# EAGLE board untitled (EAGLE 9.6.1)
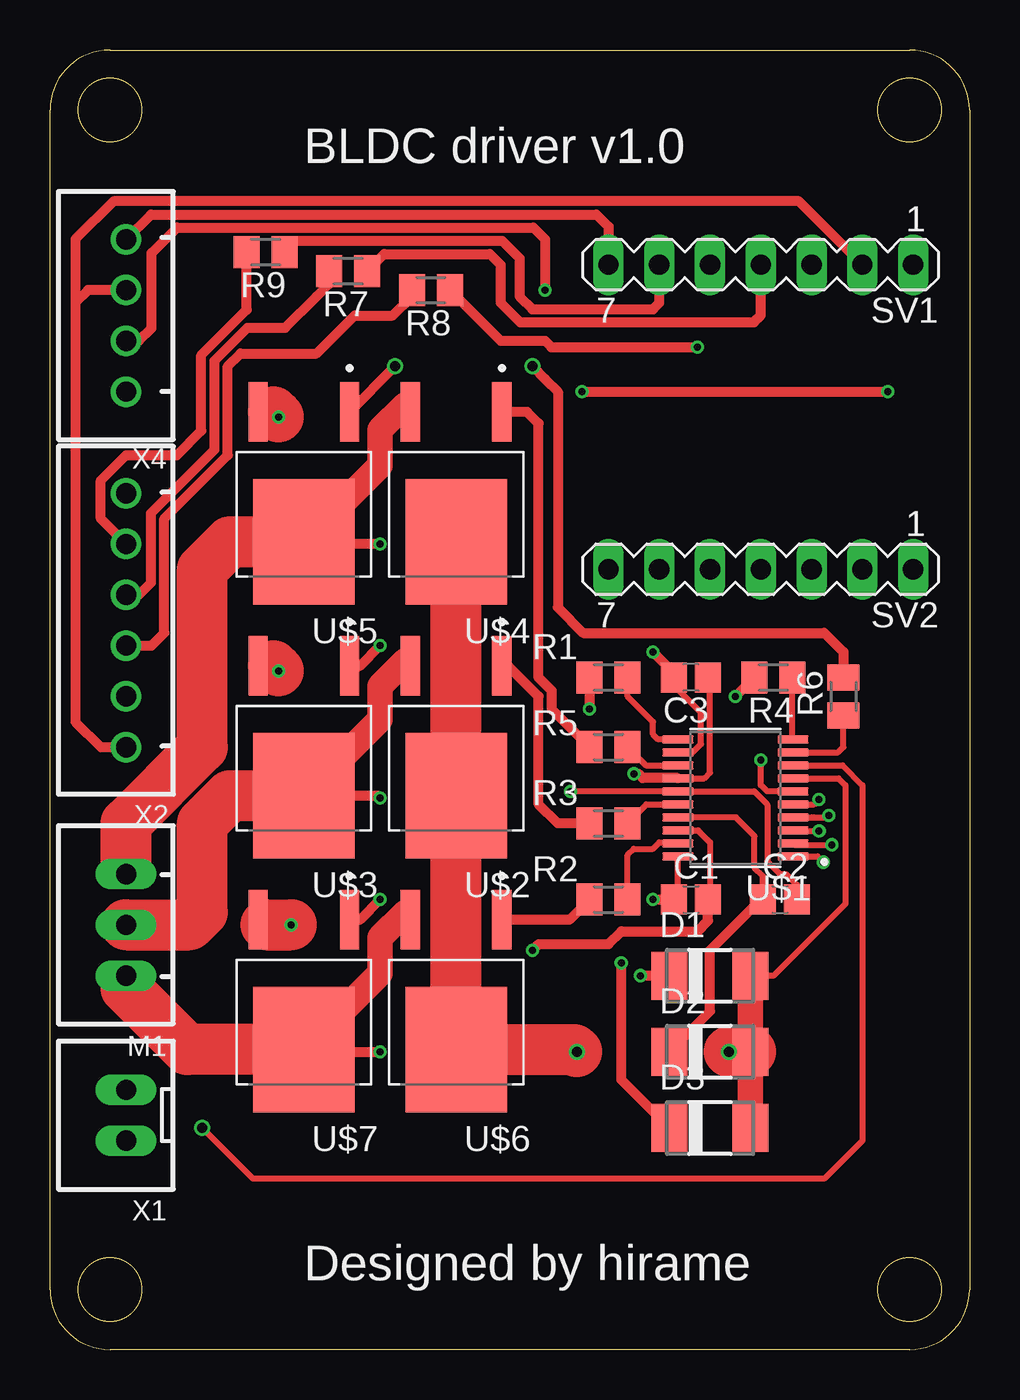
[diagram p0: board, top side]
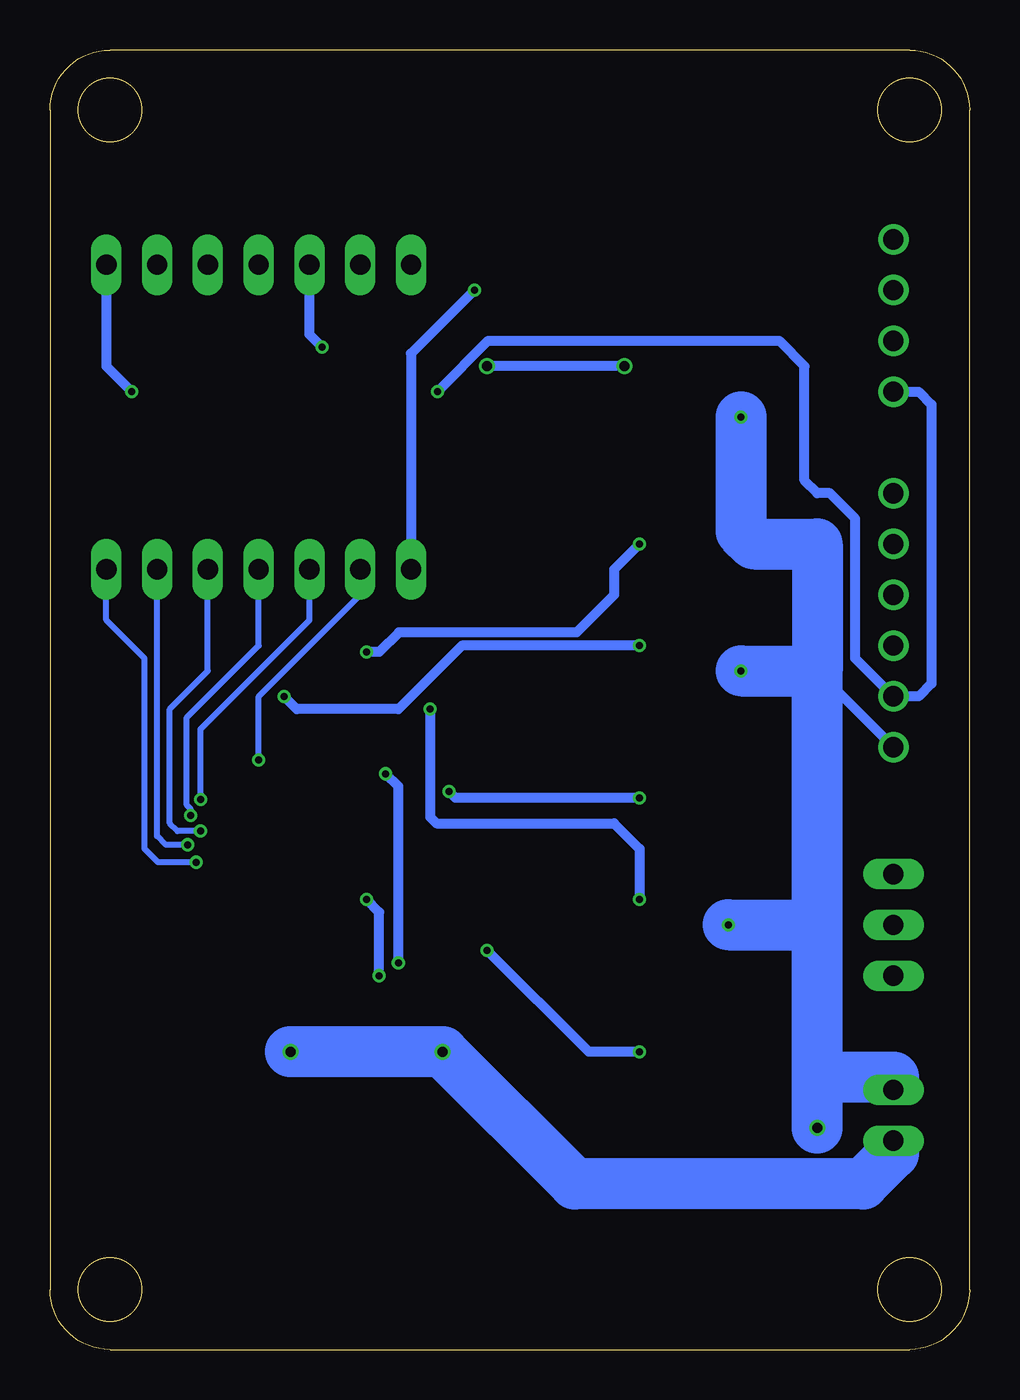
[diagram p1: board, bottom side, seen from below]

Size 46 x 65 mm. Coordinates in mm from the lower left corner, seen from the top.
Outline: 0,3 0,62 arc-90 3,65 43,65 arc-90 46,62 46,3 arc-90 43,0 3,0 arc-90 0,3
Outline: circle at 3,3 radius 1.6
Outline: circle at 3,62 radius 1.6
Outline: circle at 43,62 radius 1.6
Outline: circle at 43,3 radius 1.6
Copper layers (1*16): Top 0.035mm / dielectric 1.6mm / Bottom 0.035mm
Design rules "Elecrow_2-layer_PCB_eagle_rule": minimum track width 6mil, minimum drill 12mil, track to track 6mil, track to pad 6mil, pad to pad 6mil, via to via 8mil, smd to smd 0mil, copper to edge 20mil, drill to drill 10mil, minimum pad ring 6mil, minimum via ring 6mil, stop-mask expansion 0mil, vias tented up to drill 100mil, thermal gap 10mil

## Footprints (pad centres in the part's own frame; a part is rotated, then mirrored left to right if it is on the bottom)
C2012 = smd 1.3 x 1.5: 1 -0.85,0; 2 0.85,0
DO-214AC = smd 1.8 x 2.4: A 2.025,0; C -2.025,0
JST-XH-03-PACKAGE-LONG-PAD = drill 1.016 long: 1 -2.54,0; 2 0,0; 3 2.54,0
M2012 = smd 1.3 x 1.6: 1 -0.95,0; 2 0.95,0
MA07-1 = drill 1.016 long: 1 -7.62,0; 2 -5.08,0; 3 -2.54,0; 4 0,0; 5 2.54,0; 6 5.08,0; 7 7.62,0
SOIC65P640X120-20N = smd 1.56 x 0.41: 1 -2.88,2.925; 2 -2.88,2.275; 3 -2.88,1.625; 4 -2.88,0.975; 5 -2.88,0.325; 6 -2.88,-0.325; 7 -2.88,-0.975; 8 -2.88,-1.625; 9 -2.88,-2.275; 10 -2.88,-2.925; 11 2.88,-2.925; 12 2.88,-2.275; 13 2.88,-1.625; 14 2.88,-0.975; 15 2.88,-0.325; 16 2.88,0.325; 17 2.88,0.975; 18 2.88,1.625; 19 2.88,2.275; 20 2.88,2.925
DPAK228P990X238-4N = smd 0.97 x 2.98: 1 -2.286,-4.07; 3 2.286,-4.07 | smd 5.07 x 6.27: 4 0,2.42
JST-XH-02-PACKAGE-LONG-PAD = drill 1.016 long: 1 -1.27,0; 2 1.27,0
JST-XH-06-PACKAGE-ROUND-PAD = drill 1.016: 1 -6.35,0; 2 -3.81,0; 3 -1.27,0; 4 1.27,0; 5 3.81,0; 6 6.35,0
JST-XH-04-PACKAGE-ROUND-PAD = drill 1.016: 1 -3.81,0; 2 -1.27,0; 3 1.27,0; 4 3.81,0

## Placement (x,y rotation side)
C1  1uF  [C2012]  32.07,22.51 0 top
C2  1uF  [C2012]  36.51,22.51 0 top
C3  1uF  [C2012]  32.07,33.62 180 top
D1  [DO-214AC]  33.02,18.7 0 top
D2  [DO-214AC]  33.02,14.89 0 top
D3  [DO-214AC]  33.02,11.08 0 top
M1  JST-XH-03-PIN-LONG-PAD  [JST-XH-03-PACKAGE-LONG-PAD]  3.81,21.24 90 top
R1  [M2012]  27.94,33.62 180 top
R2  [M2012]  27.94,22.51 180 top
R3  [M2012]  27.94,26.32 180 top
R4  [M2012]  36.2,33.62 180 top
R5  [M2012]  27.94,30.13 180 top
R6  [M2012]  39.69,32.67 90 top
R7  300Ω  [M2012]  14.92,53.94 180 top
R8  300Ω  [M2012]  19.05,52.99 180 top
R9  300Ω  [M2012]  10.79,54.9 180 top
SV1  [MA07-1]  35.56,54.26 180 top
SV2  [MA07-1]  35.56,39.02 180 top
U$1  DRV8300NIPWR  [SOIC65P640X120-20N]  34.29,27.59 180 top
U$2  H-CHMOSFET  [DPAK228P990X238-4N]  20.32,30.13 180 top
U$3  H-CHMOSFET  [DPAK228P990X238-4N]  12.7,30.13 180 top
U$4  H-CHMOSFET  [DPAK228P990X238-4N]  20.32,42.83 180 top
U$5  H-CHMOSFET  [DPAK228P990X238-4N]  12.7,42.83 180 top
U$6  H-CHMOSFET  [DPAK228P990X238-4N]  20.32,17.43 180 top
U$7  H-CHMOSFET  [DPAK228P990X238-4N]  12.7,17.43 180 top
X1  JST-XH-02-PIN-LONG-PAD  [JST-XH-02-PACKAGE-LONG-PAD]  3.81,11.71 90 top
X2  JST-XH-06-PIN-ROUND-PAD  [JST-XH-06-PACKAGE-ROUND-PAD]  3.81,36.48 90 top
X4  JST-XH-04-PIN-ROUND-PAD  [JST-XH-04-PACKAGE-ROUND-PAD]  3.81,51.72 90 top

## Library data of the parts
C1-C3 R1-R9 = adafruit
D1-D3 = diode
M1 X1 X2 X4 = Rembrandt Electronics - JST XH Connectors v1-0
SV1 SV2 = con-lstb; OC_FARNELL: unknown; OC_NEWARK: unknown
U$1 = drv8300
U$2-U$7 = N-ch mosfet

## Nets
+5V: SV1.1 X2.2 X4.1
CS: X2.6
GND: SV1.2 U$1.8 U$3.3 U$5.3 U$7.3 X1.2 X2.1 X4.3
HA: SV2.1 U$1.1
HB: SV2.2 U$1.2
HC: SV2.3 U$1.3
LA: SV2.4 U$1.4
LB: SV2.5 U$1.5
LC: SV2.6 U$1.6
MISO: R8.2 X2.3
MOSI: R7.2 X2.4
N$1: C2.2 M1.2 U$1.15 U$2.3 U$3.4
N$2: C3.2 M1.3 U$1.12 U$4.3 U$5.4
N$3: C1.2 M1.1 U$1.18 U$6.3 U$7.4
N$4: R2.2 U$6.1
N$5: R1.2 U$7.1
N$6: R2.1 U$1.19
N$7: R1.1 U$1.11
N$8: R3.2 U$2.1
N$9: C1.1 D1.C U$1.20
N$10: R4.2 U$3.1
N$11: R7.1 SV1.4
N$12: R3.1 U$1.16
N$13: C2.1 D2.C U$1.17
N$14: R4.1 U$1.10
N$15: R6.2 U$5.1
N$16: R5.2 U$4.1
N$17: R5.1 U$1.13
N$18: R6.1 U$1.9
N$19: C3.1 D3.C U$1.14
N$20: R9.1 SV1.6
N$21: R8.1 SV1.5
RX: SV1.7 X4.4
SCK: R9.2 X2.5
TX: SV2.7 X4.2
VCC: D1.A D2.A D3.A U$1.7 U$2.4 U$4.4 U$6.4 X1.1

## Tracks (layer width: path | path; a pad name or v marks a point on that pad's centre or on a via)
+5V  (via drill 0.35)
  Top 0.508: v26.62,47.91 38.1,47.91 v41.91,47.91
  Bottom 0.508: X4.1 2.54,47.91 1.91,47.27 1.91,33.3 2.54,32.67 X2.2 5.71,34.58 5.71,41.56 6.99,42.83 7.62,42.83 8.26,43.47 8.26,49.18 9.53,50.45 24.08,50.45 v26.62,47.91 | SV1.1 43.18,49.18 v41.91,47.91
GND  (via drill 0.35, 0.5)
  Top 0.305: U$1.8 39.65,29.21 40.64,28.23 40.64,10.45 38.73,8.54 10.16,8.54 v7.62,11.08 | 11.17,46.9 U$5.3
  Top 0.508: 11.17,34.2 U$3.3 | 10.79,21.24 10.54,21.5 U$7.3 | X4.3 1.91,52.99 1.27,52.35 | X2.1 2.54,30.13 1.27,31.4 1.27,52.35 | SV1.2 37.47,57.44 3.17,57.44 1.27,55.53 1.27,52.35
  Top 2.54: v11.43,33.94 11.17,34.2 | v11.43,46.64 11.17,46.9 | 10.79,21.24 v12.06,21.24
  Bottom 0.305: X1.2 3.81,13.62
  Bottom 0.508: X2.1 7.62,33.94
  Bottom 2.54: v7.62,11.08 7.62,13.62 | 7.62,13.62 7.62,21.24 | 7.62,21.24 7.62,33.94 | v11.43,33.94 7.62,33.94 | v11.43,46.64 11.43,40.92 10.79,40.29 7.62,40.29 7.62,33.94 | 3.81,13.62 7.62,13.62 | v12.06,21.24 7.62,21.24
HA  (via drill 0.35)
  Top 0.305: U$1.1 38.41,24.66 v38.7,24.38
  Bottom 0.305: v38.7,24.38 40.6,24.38 41.27,25.05 41.27,34.58 43.18,36.48 SV2.1
HB  (via drill 0.35)
  Top 0.305: U$1.2 37.24,25.25 v39.11,25.25
  Bottom 0.305: v39.11,25.25 40.2,25.25 40.64,25.68 SV2.2
HC  (via drill 0.35)
  Top 0.305: U$1.3 37.2,25.93 v38.47,25.93
  Bottom 0.305: v38.47,25.93 39.62,25.93 40.01,26.32 40.01,32.03 38.1,33.94 SV2.3
LA  (via drill 0.35)
  Top 0.305: U$1.4 38.1,26.61 38.23,26.61 38.86,26.61 v38.97,26.72
  Bottom 0.305: v38.97,26.72 38.97,27.04 39.15,27.23 39.15,31.62 35.56,35.21 SV2.4
LB  (via drill 0.35)
  Top 0.305: U$1.5 38.23,27.27 v38.47,27.51
  Bottom 0.305: v38.47,27.51 38.47,31.03 33.02,36.48 SV2.5
LC  (via drill 0.35)
  Top 0.305: U$1.6 35.88,27.91 35.56,28.24 v35.56,29.5
  Bottom 0.305: v35.56,29.5 35.56,32.67 30.48,37.75 SV2.6
MISO
  Top 0.508: X2.3 5.08,35.21 5.71,35.84 5.71,41.56 8.89,44.73 8.89,49.18 9.53,49.81 13.34,49.81 15.24,51.72 17.14,51.72 18.1,52.67 R8.2
MOSI
  Top 0.508: X2.4 4.45,37.75 5.05,38.36 5.05,41.83 8.23,45.01 8.23,49.45 9.89,51.11 10.82,51.11 11.77,51.11 13.34,52.67 13.97,53.31 R7.2
N$1  (via drill 0.35)
  Top 0.305: C2.2 37.36,23.25 36.83,23.78 36.51,23.78 35.88,24.41 35.88,27.27 35.23,27.91 U$1.15 v26.04,27.91
  Top 0.508: U$2.3 17.78,34.45 | U$3.4 16.39,27.71 v16.51,27.59
  Top 1.27: U$3.4 16.51,31.52 16.51,33.18 17.78,34.45
  Top 2.54: U$3.4 9.01,27.71 7.62,26.32 7.62,21.88 6.99,21.24 M1.2
  Bottom 0.508: v26.04,27.91 25.72,27.59 v16.51,27.59
N$2  (via drill 0.35)
  Top 0.2: U$4.3 17.78,47.15 17.78,47.27
  Top 0.305: U$1.12 32.15,29.86 32.56,30.28 32.56,31.86 31.22,33.2 C3.2
  Top 0.508: v30.16,34.89 31.22,33.84 C3.2 | M1.3 3.81,24.41 | v16.51,40.29 12.82,40.29 U$5.4
  Top 1.27: U$5.4 16.51,44.22 16.51,46.01 17.78,47.27
  Top 2.54: 3.81,24.41 3.81,26.32 7.62,30.13 7.62,39.02 9.01,40.41 U$5.4
  Bottom 0.508: v16.51,40.29 17.78,39.02 17.78,37.75 19.66,35.87 28.55,35.87 29.53,34.89 v30.16,34.89
N$3  (via drill 0.35)
  Top 0.152: U$7.4 12.82,14.89
  Top 0.2: U$6.3 17.78,21.75 17.78,21.88
  Top 0.305: U$1.18 32.42,25.96 33.02,25.37 33.02,22.61 C1.2
  Top 0.508: 12.82,14.89 v16.51,14.89 | v24.13,19.97 24.45,20.29 27.94,20.29 28.57,20.92 32.38,20.92 32.92,21.45 C1.2 | 3.81,18.06 M1.1
  Top 1.27: U$7.4 16.51,18.82 16.51,20.61 17.78,21.88
  Top 2.54: U$7.4 6.87,15.01 3.81,18.06
  Bottom 0.508: v16.51,14.89 19.05,14.89 v24.13,19.97
N$4
  Top 0.508: R2.2 25.98,21.5 U$6.1
N$5  (via drill 0.35)
  Top 0.508: R1.2 v26.99,32.04 v26.99,32.03 | v16.51,22.51 15.5,21.5 U$7.1
  Bottom 0.508: v26.99,32.03 26.99,26.64 26.67,26.32 17.78,26.32 16.51,25.05 v16.51,22.51
N$6
  Top 0.305: R2.1 28.89,24.73 29.21,25.05 30.16,25.05 30.48,25.37 31.36,25.37 U$1.19
N$7
  Top 0.305: U$1.11 30.41,30.52 30.16,30.77 30.16,31.4 28.89,32.67 R1.1
N$8
  Top 0.508: R3.2 25.4,26.32 24.45,27.27 24.45,32.67 22.92,34.2 U$2.1
N$9  (via drill 0.35)
  Top 0.305: 31.41,22.7 U$1.20
  Top 0.508: D1.C v29.53,18.7 | v30.16,22.51 C1.1 31.41,22.7
  Bottom 0.508: v30.16,22.51 29.53,21.88 v29.53,18.7
N$10  (via drill 0.35)
  Top 0.508: U$3.1 15.5,34.2 v16.51,35.21 | v34.29,32.67 R4.2
  Bottom 0.508: v16.51,35.21 25.4,35.21 28.57,32.03 33.66,32.03 v34.29,32.67
N$11
  Top 0.508: R7.1 16.72,54.79 22.01,54.79 22.54,54.26 22.54,52.35 23.52,51.38 35.22,51.38 35.56,51.72 SV1.4
N$12
  Top 0.305: R3.1 29.84,27.27 U$1.16
N$13
  Top 0.305: C2.1 35.66,23.68 35.24,24.1 35.24,25.68 34.31,26.61 U$1.17
  Top 0.508: D2.C 33.02,16.91 33.02,19.97 35.56,22.51 C2.1
N$14
  Top 0.305: U$1.10 37.15,30.54 R4.1
N$15  (via drill 0.5)
  Top 0.508: U$5.1 v17.27,49.18 | v24.13,49.18 24.77,48.55 | 24.77,48.55 25.4,47.91 25.4,37.11 26.67,35.84 38.73,35.84 39.69,34.89 R6.2 | 24.77,48.55
  Bottom 0.508: v17.27,49.18 v24.13,49.18
N$16
  Top 0.508: R5.2 25.11,32.01 25.11,32.94 24.45,33.6 24.45,46.32 23.87,46.9 U$4.1
N$17
  Top 0.305: R5.1 29.8,29.21 U$1.13
N$18
  Top 0.305: U$1.9 39.42,29.86 39.69,30.13 R6.1
N$19  (via drill 0.35)
  Top 0.305: U$1.14 32.73,28.57 33.02,28.86 33.02,33.52 C3.1
  Top 0.508: D3.C 28.57,13.5 v28.57,19.34 | v29.21,28.8 29.43,28.8 29.65,28.57 U$1.14
  Bottom 0.508: v28.57,19.34 28.57,28.16 v29.21,28.8
N$20
  Top 0.508: R9.1 12.3,55.45 22.62,55.45 23.5,54.58 23.5,52.67 24.13,52.04 30.16,52.04 30.48,52.35 SV1.6
N$21  (via drill 0.35)
  Top 0.508: R8.1 22.54,50.45 24.77,50.45 25.08,50.13 v32.38,50.13
  Bottom 0.508: v32.38,50.13 33.02,50.77 SV1.5
RX
  Top 0.508: X4.4 5.05,56.77 27.33,56.77 27.94,56.16 SV1.7
SCK
  Top 0.508: X2.5 2.54,41.56 2.54,43.47 3.81,44.73 6.35,44.73 7.57,45.95 7.57,49.73 9.85,52 R9.2
TX  (via drill 0.35)
  Top 0.508: X4.2 4.45,50.45 5.08,51.09 5.08,54.84 6.35,56.11 24.18,56.11 24.77,55.53 v24.77,52.99
  Bottom 0.508: v24.77,52.99 27.94,49.81 SV2.7
VCC  (via drill 0.5)
  Top 0.305: U$1.7 39.45,28.57 39.79,28.23 39.79,22.29 36.2,18.7 D1.A
  Top 1.27: D1.A D2.A D3.A
  Top 2.54: U$4.4 20.32,28.86 U$2.4 U$6.4 26.23,15.01 v26.35,14.89 | D2.A v33.97,14.89
  Bottom 0.508: X1.1 3.81,9.81
  Bottom 2.54: v33.97,14.89 v26.35,14.89 19.75,8.29 5.33,8.29 3.81,9.81

## Text on the board
tNames: BLDC driver v1.0 | Designed by hirame